# Altium PCB STM32_Pi_HAT.PcbDoc
Units mil, origin at the board's own origin, x right, y up, seen from the top; angles counter-clockwise.
Board outline 2559.08 x 1181.01 mil, 2 copper layers (Top Layer, Bottom Layer); 40 components, 33 nets, 242 pads, 339 vias.
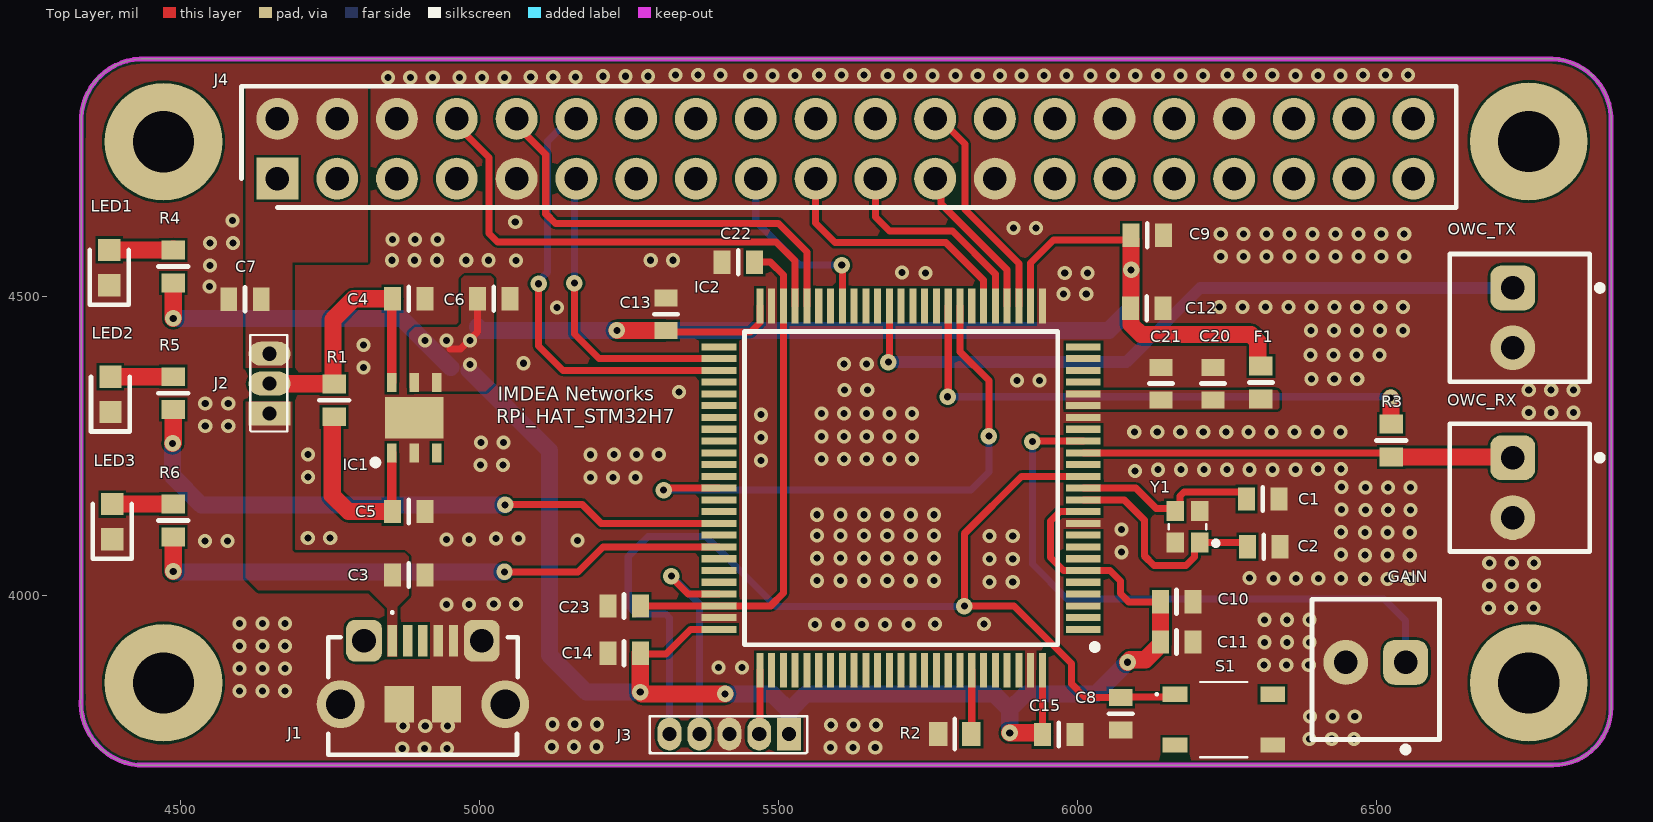
[diagram p0: Top Layer view]
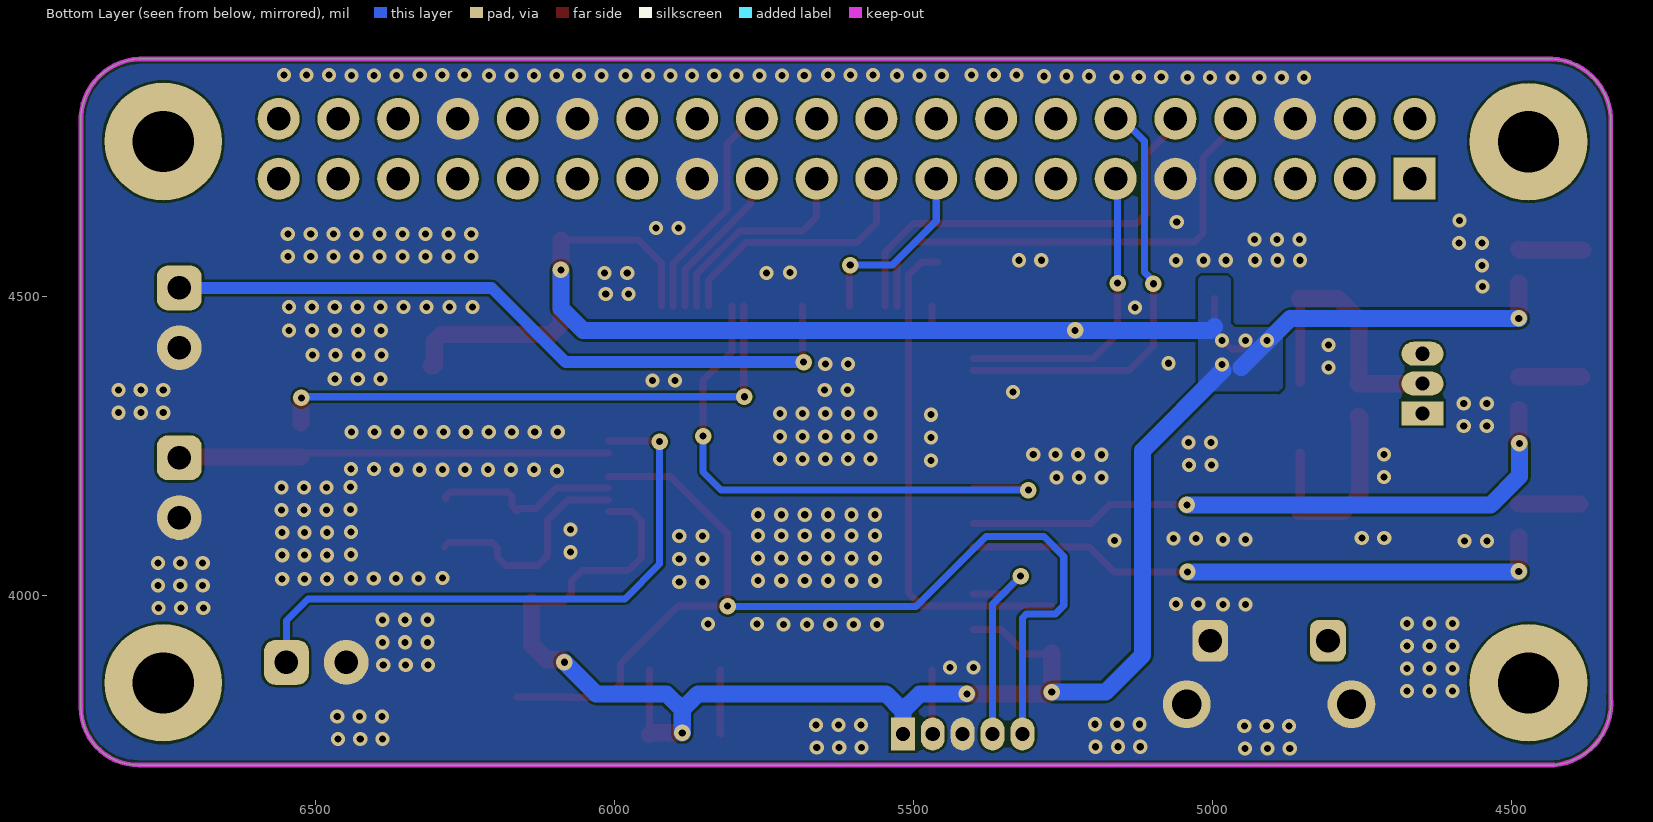
[diagram p1: Bottom Layer view, seen from below]
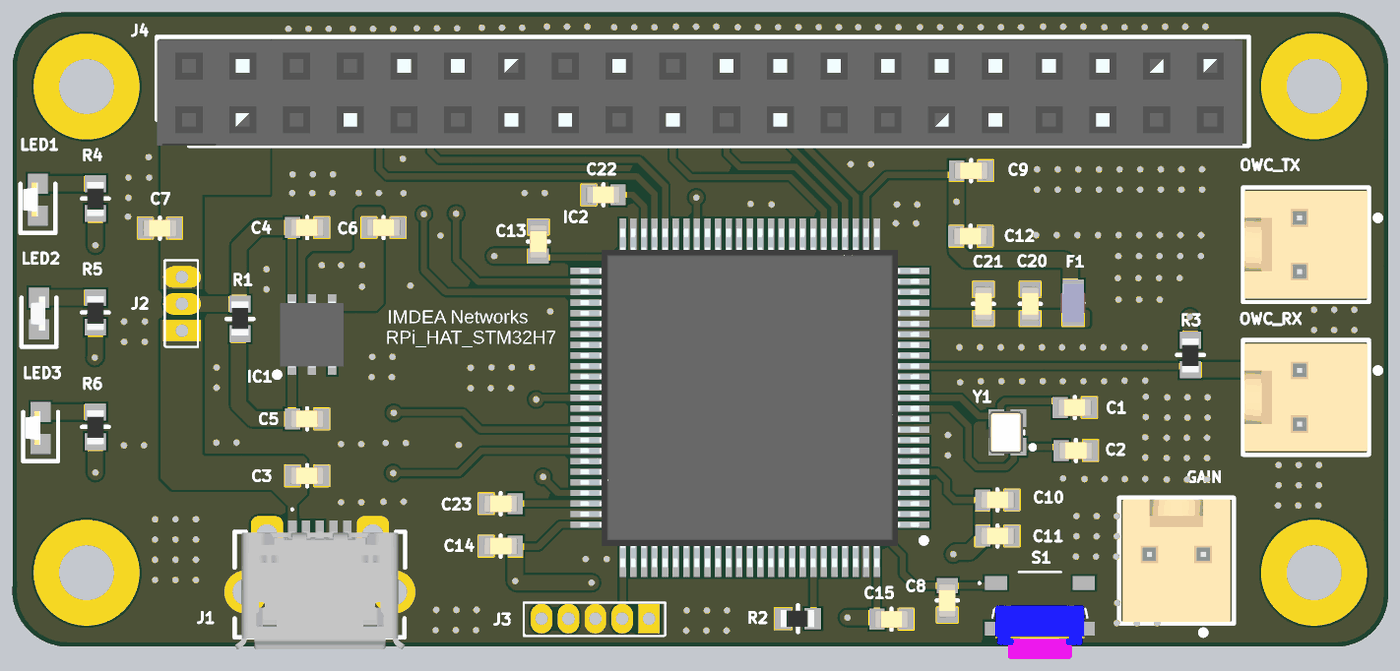
[diagram p2: 3D render of the assembled board from above, using the file's embedded part models]

## Layer stack, top to bottom
Top Solder: solder mask 0.4, Solder Resist, Dk 3.5
Top Layer: signal copper 1.4
Dielectric 1: dielectric 12.6, FR-4, Dk 4.8
Bottom Layer: signal copper 1.4
Bottom Solder: solder mask 0.4, Solder Resist, Dk 3.5

## Board outline
4429,3717 cw(c4438.5,3821.5) 4334,3831 4334,4800 cw(c4437.5,4794.5) 4443,4898 6795,4898 cw(c6790.66,4796) 6892.66,4791.66 6892.66,3812.85 cw(c6796.4,3813.26) 6796,3717

## Design rules (kind name [scope] priority, off if disabled: settings)
BoardOutlineClearance [All] p1: gap=7.87 ignorepadtopadclearanceinfootprint=FALSE
Clearance [All] p1: gap=3.94 ignorepadtopadclearanceinfootprint=FALSE
HoleSize [All] p1: absolutevalues=TRUE maxlimit=118.11 minlimit=1 maxpercent=80.000 minpercent=20.000
MinimumSolderMaskSliver [All] p1: minsoldermaskwidth=7.09
PolygonConnect [All] p1: connectstyle=Direct reliefconductorwidth=10 reliefentries=4 polygonreliefangle="90 Angle" airgapwidth=10
RoutingVias [All] p1: holewidth=28 width=50 viastyle="Through Hole" minholewidth=28 minwidth=50 maxholewidth=28 maxwidth=50
SilkToSolderMaskClearance [IsPad] p1: minsilkscreentomaskgap=3.94 clearancetoexposedcopper=TRUE
SolderMaskExpansion [All] p1: expansion=0 istentingtop=FALSE
SupplyNets "Schematic Supply Nets_4" [InNet('GND')] p1: voltage=0.000
SupplyNets "Schematic Supply Nets_9" [InNet('VUSB')] p2: voltage=0.000
SupplyNets "Schematic Supply Nets_8" [InNet('VCC_IN')] p3: voltage=0.000
SupplyNets "Schematic Supply Nets_7" [InNet('5V_RPi')] p4: voltage=0.000
SupplyNets "Schematic Supply Nets_3" [InNet('VDDA')] p5: voltage=0.000
SupplyNets "Schematic Supply Nets_2" [InNet('VDD_MCU')] p6: voltage=0.000
SupplyNets "Schematic Supply Nets_1" [InNet('VCAP')] p7: voltage=0.000
Width [All] p1: maxlimit=393.7 minlimit=10 preferedwidth=10
27 further rules are at their usual default settings.

## Components (designator, comment, footprint, x,y, rotation, side; value= is the part's Value field where it differs from the comment)
C1 "8pF" CAP0603_ 6310,4162 r0 top
C2 "8pF" CAP0603_ 6312,4082 r0 top
C3 "10uF,16V" CAP0603_ 4881.89,4035 r0 top
C4 "10uF,16V" CAP0603_ 4881.89,4497 r0 top
C5 "100nF,50v" CAP0603_ 4881.89,4141 r0 top
C6 "10uF,16V" CAP0603_ 5024,4497 r0 top
C7 "10uF,16V" CAP0603_ 4608,4496 r180 top
C8 "100nF,50v" CAP0603_ 6072.67,3803 r270 top
C9 "4.7uF,16V" CAP0603_ 6117,4603 r0 top
C10 "100nF,50v" CAP0603_ 6166,3990 r0 top
C11 "100nF,50v" CAP0603_ 6166,3923 r0 top
C12 "100nF,50v" CAP0603_ 6116,4481 r0 top
C13 "100nF,50v" CAP0603_ 5312,4471 r90 top
C14 "100nF,50v" CAP0603_ 5242,3904 r180 top
C15 "100nF,50v" CAP0603_ 5969,3768 r0 top
C20 "10uF,16V" CAP0603_ 6227,4355.03 r90 top
C21 "100nF,50v" CAP0603_ 6140,4355.03 r90 top
C22 "2.2uF,10V" CAP0603_ 5433,4558 r180 top
C23 "2.2uF,10V" CAP0603_ 5242,3983 r180 top
F1 "10" IND0603_ 6307,4357 r270 top
GAIN "61900211121" 61900211121 6499,3877 r0 top
IC1 "ST1L05CPU33R" SON95P300X300X100-7N-D 4891,4297.94 r90 top
IC2 "STM32H723VET6" QFP50P1600X1600X160-100N 5705.35,4180.22 r180 top
J1 "10118194-0001LF" 101181940001LF 4905.57,3832.48 r0 top
J2 "CONN_H3_1.27MM" CONN_H3_1.27MM 4645.06,4300.28 r90 top
J3 "CONN_H5_1.27MM" CONN_H5_1.27MM 5522.72,3765.06 r180 top
J4 "1992" RHDR40W64P254_2X20_5130X500X1375P 4662.17,4697.8 r0 top
LED1 "150060SS75000" LEDC1608X80N 4381,4549 r90 top
LED2 "150060GS75000" LEDC1608X70N 4383,4337 r90 top
LED3 "150060BS75000" LEDC1608X80N 4386,4124 r90 top
OWC_RX "61900211121" 61900211121 6740,4181 r90 top
OWC_TX "61900211121" 61900211121 6740,4465 r90 top
R1 "10K,0603" RES0603_ 4757,4327 r270 top
R2 "10K,0603" RES0603_ 5795,3769 r0 top
R3 "JUMPER" RES0603_ 6525,4260 r90 top
R4 "330R" RES0603_ 4488,4551 r90 top
R5 "330R" RES0603_ 4488,4339 r90 top
R6 "330R" RES0603_ 4488,4126 r90 top
S1 "SKRPASE010" SKRPASE010 6245,3793 r0 top
Y1 "NX2016SA-25.000M-STD-CZS-1" NX2016SA32MEXS00ACS06465 6184.33,4115.57 r90 top

## Footprints (in the part's own frame and the unit in brackets; to place one, negate y for a bottom-side part, rotate by r counter-clockwise, add the part's x,y. Pads: shape width x height; smd on the part's side, far side on the other; paste and mask are expansions set on the pad)
61900211121 [mm] "2.54mm Male Locking Header, 2p"
  rrect50% 1.905x1.905 hole 1: 1(1.27,0.3)
  round 1.905 hole 1: 2(-1.27,0.3)
  silkscreen extent -2.71,-3.52 2.71,2.98, body extent -2.54,-2.9 2.54,2.9, height 11.53
101181940001LF [mm]
  rect 0.4x1.35 smd: 1(-1.3,2.35) 2(-0.65,2.35) 3(0,2.35) 4(0.65,2.35) 5(1.3,2.35)
  rrect50% 1.524x1.778 hole 1.01: MH1(-2.5,2.35) MH4(2.5,2.35)
  round 2.032 hole 1.25: MH2(-3.5,-0.35) MH3(3.5,-0.35)
  rect 1.25x1.55 smd: MP1(-1,-0.35) MP2(1,-0.35)
  silkscreen extent -4.03,-2.5 4.03,3.6, body extent -4.02,-3.07 4.03,2.51, height 2.76
CAP0603_ [mm]
  rect 0.72x0.99 smd paste+0 mask+0.051: 1(-0.69,0) 2(0.69,0)
  silkscreen extent 0,-0.5 0,0.5, body extent -0.8,-0.41 0.8,0.41, height 0.57
CONN_H3_1.27MM [mm]
  rect 1.016x1.778 hole 0.6: 1(0.12,-0.1)
  oval 1.016x1.778 hole 0.6: 2(1.39,-0.1) 3(2.66,-0.1)
  silkscreen extent -0.64,-0.86 3.46,0.71
CONN_H5_1.27MM [mm]
  rect 1.016x1.397 hole 0.6: 1(0.12,-0.1)
  oval 1.016x1.397 hole 0.6: 2(1.39,-0.1) 3(2.66,-0.1) 4(3.93,-0.1) 5(5.2,-0.1)
  silkscreen extent -0.64,-0.86 6.04,0.71
IND0603_ [mm]
  rect 0.8x1 smd mask+0.051: 1(-0.7,0) 2(0.7,0)
  silkscreen extent 0,-0.5 0,0.5, body extent -0.9,-0.6 0.9,0.58, height 0.83
LEDC1608X70N [mm]
  rect 0.95x0.95 smd: 1(-0.75,0) 2(0.75,0)
  silkscreen extent -1.58,-0.82 0.75,0.82, body extent -0.8,-0.3 0.8,0.4, height 0.4
LEDC1608X80N [mm]
  rect 0.95x0.95 smd: 1(-0.75,0) 2(0.75,0)
  silkscreen extent -1.58,-0.82 0.75,0.82, body extent -0.8,0 0.8,0.7, height 0.4
NX2016SA32MEXS00ACS06465 [mm]
  rect 0.85x0.75 smd: 1(-0.675,-0.525) 2(0.675,-0.525) 3(0.675,0.525) 4(-0.675,0.525)
  silkscreen extent -0.8,-1.3 0.1,0.8, body extent -1,-0.73 1,0.87, height 0.46
QFP50P1600X1600X160-100N [mm]
  rect 1.475x0.3 smd: 1(-7.738,6) 2(-7.738,5.5) 3(-7.738,5) 4(-7.738,4.5) 5(-7.738,4) 6(-7.738,3.5) 7(-7.738,3) 8(-7.738,2.5) 9(-7.738,2) 10(-7.738,1.5) 11(-7.738,1) 12(-7.738,0.5) 13(-7.738,0) 14(-7.738,-0.5) 15(-7.738,-1) 16(-7.738,-1.5) 17(-7.738,-2) 18(-7.738,-2.5) 19(-7.738,-3) 20(-7.738,-3.5) 21(-7.738,-4) 22(-7.738,-4.5) 23(-7.738,-5) 24(-7.738,-5.5) 25(-7.738,-6) 51(7.738,-6) 52(7.738,-5.5) 53(7.738,-5) 54(7.738,-4.5) 55(7.738,-4) 56(7.738,-3.5) 57(7.738,-3) 58(7.738,-2.5) 59(7.738,-2) 60(7.738,-1.5) 61(7.738,-1) 62(7.738,-0.5) 63(7.738,0) 64(7.738,0.5) 65(7.738,1) 66(7.738,1.5) 67(7.738,2) 68(7.738,2.5) 69(7.738,3) 70(7.738,3.5) 71(7.738,4) 72(7.738,4.5) 73(7.738,5) 74(7.738,5.5) 75(7.738,6)
  rect 0.3x1.475 smd: 26(-6,-7.738) 27(-5.5,-7.738) 28(-5,-7.738) 29(-4.5,-7.738) 30(-4,-7.738) 31(-3.5,-7.738) 32(-3,-7.738) 33(-2.5,-7.738) 34(-2,-7.738) 35(-1.5,-7.738) 36(-1,-7.738) 37(-0.5,-7.738) 38(0,-7.738) 39(0.5,-7.738) 40(1,-7.738) 41(1.5,-7.738) 42(2,-7.738) 43(2.5,-7.738) 44(3,-7.738) 45(3.5,-7.738) 46(4,-7.738) 47(4.5,-7.738) 48(5,-7.738) 49(5.5,-7.738) 50(6,-7.738) 76(6,7.738) 77(5.5,7.738) 78(5,7.738) 79(4.5,7.738) 80(4,7.738) 81(3.5,7.738) 82(3,7.738) 83(2.5,7.738) 84(2,7.738) 85(1.5,7.738) 86(1,7.738) 87(0.5,7.738) 88(0,7.738) 89(-0.5,7.738) 90(-1,7.738) 91(-1.5,7.738) 92(-2,7.738) 93(-2.5,7.738) 94(-3,7.738) 95(-3.5,7.738) 96(-4,7.738) 97(-4.5,7.738) 98(-5,7.738) 99(-5.5,7.738) 100(-6,7.738)
  silkscreen extent -8.35,-6.65 6.65,6.87, body extent -8,-8 8,8, height 1.6
RES0603_ [mm]
  rect 0.8x1 smd paste+0 mask+0.051: 1(-0.7,0) 2(0.7,0)
  silkscreen extent 0,-0.64 0,0.64, body extent -0.82,-0.4 0.78,0.4, height 0.4
RHDR40W64P254_2X20_5130X500X1375P [mil]
  rect 70x70 hole 39.37: 1(0,0)
  round 70 hole 39.37: 2(0,100) 3(100,0) 4(100,100) 5(200,0) 6(200,100) 7(300,0) 8(300,100) 9(400,0) 10(400,100) 11(500,0) 12(500,100) 13(600,0) 14(600,100) 15(700,0) 16(700,100) 17(800,0) 18(800,100) 19(900,0) 20(900,100) 21(1000,0) 22(1000,100) 23(1100,0) 24(1100,100) 25(1200,0) 26(1200,100) 27(1300,0) 28(1300,100) 29(1400,0) 30(1400,100) 31(1500,0) 32(1500,100) 33(1600,0) 34(1600,100) 35(1700,0) 36(1700,100) 37(1800,0) 38(1800,100) 39(1900,0) 40(1900,100)
  silkscreen extent -60,-48 1972,154, body extent -60,-48 1960,148, height 541
SKRPASE010 [mm]
  rect 1.05x0.65 smd: 1(-2.075,1.075) 2(2.075,1.075) 3(-2.075,-1.075) 4(2.075,-1.075)
  silkscreen extent -2.9,-1.6 1,1.6, body extent -2.3,-1.6 2.3,1.6, height 2.41
SON95P300X300X100-7N-D [mm]
  rect 0.8x0.4 smd: 1(-1.5,0.95) 2(-1.5,0) 3(-1.5,-0.95) 4(1.5,-0.95) 5(1.5,0) 6(1.5,0.95)
  rect 1.75x2.5 smd: 7(0,0)
  silkscreen extent -2.02,1.52 -1.78,1.77, body extent -1.55,-1.5 1.55,1.5, height 1

## Part data
C1 C2: library part C0603-4.7pF-100v, "Multilayer Ceramic Capacitors MLCC - SMD/SMT WCAP-CSGP 100V 4.7pF 0603 .25pFTol", Fabricant=WURTH, Fournisseur=Mouser, Ref Fabricant=885012006091, Ref Fournisseur=710-885012006091, Unit Price=0.13, Unit Price(100)=0.053
C3 C4 C6 C7 C20: library part C0603-10uF-16v, "SMD/SMT 10uF 0603 10% 16V MLCC", Fabricant="Murata Electronics", Fournisseur=Mouser, Help URL=https://www.mouser.mx/datasheet/2/281/murata_03052018_GRM_Series_1-1310166.pdf, Ref Fabricant=GRM188R61C106KALJ, Ref Fournisseur=81-GRM188R61C106KALJ, Unit Price=0.559, Unit Price(100)=0.233
C5 C8 C10 C11 C12 C13 C14 C15 C21: library part C0603-100nF-50V-X7R, "Capacitor, Ceramic, 10nF, 50V, 20%, X7R, 0603", Fabricant=YAGEO, Fournisseur=Mouser, Ref Fabricant=C0603MRY5V9BB104, Ref Fournisseur=603-C0603MRY5V9BB104, Unit Price=0.13, Unit Price(100)=0.03
C9: library part C0603-4.7uF-16V-X5R, "Multilayer Ceramic Capacitors MLCC - SMD/SMT 0603 16VDC 4.7uF 20% X5R", Fabricant="Taiyo Yuden", Fournisseur=Mouser, Ref Fabricant=EMK107ABJ475MA-T, Ref Fournisseur=963-EMK107ABJ475MA-T, Unit Price=0.364, Unit Price(100)=0.109
C22 C23: library part C0603-2.2uF-10V-X5R, "Multilayer Ceramic Capacitors MLCC - SMD/SMT WCAP-CSGP 2.2uF 0603 20% 10V MLCC", Fabricant="Wurth Electronics", Fournisseur=Mouser, Ref Fabricant=885012106011, Ref Fournisseur=710-885012106011, Unit Price=0.208, Unit Price(100)=0.182
F1: library part MH1608-100Y, "Ferrite Beads 10 ohms 25% HIGH CURRENT 6A", Fabricant=Bourns, Fournisseur=MOUSER, Help URL=https://www.mouser.mx/datasheet/2/54/mh-777565.pdf, Ref Fabricant=MH1608-100Y, Ref Fournisseur=652-MH1608-100Y, Unit Price=0.13, Unit Price(100)=0.027
GAIN OWC_RX OWC_TX: library part CMP-1502-00584-3, Color=Beige, Contact Resistance=20mΩ, Current Rating=3A, Flammability Rating="UL94 V-0", Insulation Resistance=1GΩ, Max Operating Temperature=105°C, Min Operating Temperature=-40°C, Operating Supply Voltage=250V, Connector Type="Male Pin", Contact Gender=Male, Contact Material=Copper, Contact Mating Length=7.493mm, Contact Plating=Tin, Fastening Type=Friction, Gender=Male, Height=11.75mm, Housing Material=Nylon, Lead Pitch=2.54mm, Length=5.08mm, Mount="Through Hole", NexarPartId=18818218, Number of Contacts=2, Number of Pins=2, Number of Positions=2, Number of Rows=1, Orientation=Vertical, Packaging=Bulk, Pitch=2.54mm, REACH SVHC=Unknown, RoHS=Compliant, Termination="Through Hole", Voltage Rating=250V, Width=5.12mm
IC1: "Integrated Circuit", Manufacturer_Name=STMicroelectronics, Mouser Part Number=511-ST1L05CPU33R, Arrow Part Number=ST1L05CPU33R, Arrow Price/Stock=https://www.arrow.com/en/products/st1l05cpu33r/stmicroelectronics?utm_currency=USD&region=nac, Datasheet Link=https://www.st.com/resource/en/datasheet/st1l05.pdf, Height=1mm, Manufacturer_Part_Number=ST1L05CPU33R, Mouser Price/Stock=https://www.mouser.co.uk/ProductDetail/STMicroelectronics/ST1L05CPU33R?qs=J6yVZnuyYCM7Ijtp87hQ4A%3D%3D
IC2: library part CMP-005-000001-1, "Integrated Circuit", Manufacturer_Name=STMicroelectronics, Mouser Part Number=511-STM32H723VET6, Arrow Part Number=STM32H723VET6, Arrow Price/Stock=https://www.arrow.com/en/products/stm32h723vet6/stmicroelectronics?utm_currency=USD&region=nac, Datasheet Link=https://www.st.com/resource/en/datasheet/stm32h723zg.pdf, Design Item ID=STM32H723VET6, Height=1.6mm, Manufacturer_Part_Number=STM32H723VET6, Mouser Price/Stock=https://www.mouser.co.uk/ProductDetail/STMicroelectronics/STM32H723VET6?qs=sPbYRqrBIVnD9Udgf5csJA%3D%3D, Source=SamacSys.SchLib
J1: "Connector", Manufacturer_Name="Amphenol Communications Solutions", Arrow Part Number=10118194-0001LF, Arrow Price/Stock=https://www.arrow.com/en/products/10118194-0001lf/amphenol-fci?utm_currency=USD&region=nac, Datasheet Link=https://www.amphenol-cs.com/micro-usb-101181940001lf.html, Height=3.25mm, Manufacturer_Part_Number=10118194-0001LF
J4: "Connector", Manufacturer_Name=Adafruit, Mouser Part Number=485-1992, Arrow Part Number=1992, Arrow Price/Stock=https://www.arrow.com/en/products/1992/adafruit-industries?utm_currency=USD&region=nac, Datasheet Link=https://cdn-shop.adafruit.com/datasheets/1992_datasheet2.pdf, Height=13.75mm, Manufacturer_Part_Number=1992, Mouser Price/Stock=https://www.mouser.co.uk/ProductDetail/Adafruit/1992?qs=GURawfaeGuBPldm8Estq5w%3D%3D
LED1: "LED", Manufacturer_Name="Wurth Elektronik", Mouser Part Number=710-150060SS75000, Datasheet Link=https://www.we-online.com/catalog/datasheet/150060SS75000.pdf, Height=0.8mm, Manufacturer_Part_Number=150060SS75000, Mouser Price/Stock=https://www.mouser.co.uk/ProductDetail/Wurth-Elektronik/150060SS75000?qs=LlUlMxKIyB0oQaxwspeTEA%3D%3D
LED2: "LED", Manufacturer_Name="Wurth Elektronik", Mouser Part Number=710-150060GS75000, Datasheet Link=https://www.we-online.com/catalog/datasheet/150060GS75000.pdf, Height=0.7mm, Manufacturer_Part_Number=150060GS75000, Mouser Price/Stock=https://www.mouser.co.uk/ProductDetail/Wurth-Elektronik/150060GS75000?qs=LlUlMxKIyB0UYkq5lDO8nA%3D%3D
LED3: "LED", Manufacturer_Name="Wurth Elektronik", Mouser Part Number=710-150060BS75000, Datasheet Link=https://www.we-online.com/catalog/datasheet/150060BS75000.pdf, Height=0.8mm, Manufacturer_Part_Number=150060BS75000, Mouser Price/Stock=https://www.mouser.co.uk/ProductDetail/Wurth-Elektronik/150060BS75000?qs=LlUlMxKIyB2DLLpXQThavA%3D%3D
R1 R2: library part R0603-10K-1/10W-1%, "Thick Film Resistors - SMD 10K OHM 1% 0603", Fabricant=Yageo, Fournisseur=Mouser, Ref Fabricant=RC0603FR-0710KL, Ref Fournisseur=603-RC0603FR-0710KL, Unit Price=0.13, Unit Price(100)=0.008
R3: library part R0603-0R-1/10W-5%, "Resistor, ThinFilm, 0R, 5%, 1/8W, 0603", Fabricant=Yageo, Fournisseur=Mouser, Ref Fabricant=SFR03EZPJ000, Ref Fournisseur=755-SFR03EZPJ000, Unit Price=0.13, Unit Price(100)=0.03
R4 R5 R6: library part R0603-330R-1/10W-1%_1, "Thick Film Resistors - SMD 330Ohmns 1/10W 0603 5%", Fabricant=YAGEO, Fournisseur=Mouser, Help URL=https://www.mouser.mx/ProductDetail/YAGEO/AR0603JR-07330RL?qs=tggtontpCXOcsXkekzf4sA%3D%3D, Ref Fabricant=AR0603JR-07330RL, Ref Fournisseur=603-AR0603JR-07330RL, Unit Price=0.403, Unit Price(100)=0.137
S1: "Switch", Manufacturer_Name="ALPS Electric", Mouser Part Number=688-SKRPASE010, Datasheet Link=https://www.mouser.ca/ProductDetail/ALPS/SKRPASE010?qs=byeeYqUIh0NdKk8WD590Nw%3D%3D, Height=2.5mm, Manufacturer_Part_Number=SKRPASE010, Mouser Price/Stock=https://www.mouser.co.uk/ProductDetail/Alps-Alpine/SKRPASE010?qs=byeeYqUIh0NdKk8WD590Nw%3D%3D
Y1: "Crystal or Oscillator", Manufacturer_Name=NDK, Mouser Part Number=344-NX2016SA25MSTZS1, Datasheet Link=https://datasheet.datasheetarchive.com/originals/distributors/DKDS-17/332064.pdf, Manufacturer_Part_Number=NX2016SA-25.000M-STD-CZS-1, Mouser Price/Stock=https://www.mouser.co.uk/ProductDetail/NDK/NX2016SA-25.000M-STD-CZS-1?qs=w%2Fv1CP2dgqozB742%252BoULZA%3D%3D
J2: Fabricant=Harwin, Fournisseur=Mouser, Help URL=https://www.mouser.mx/datasheet/2/181/M50-353-1100851.pdf, Ref Fabricant=M50-3530342, Ref Fournisseur=855-M50-3530342, Unit Price=0.182, Unit Price(100)=0.088
J3: Fabricant=Samtec, Fournisseur=Mouser, Help URL=https://www.mouser.mx/datasheet/2/527/tms_th-1370533.pdf, Ref Fabricant=TMS10560GS, Ref Fournisseur=200-TMS10560GS, Unit Price(=1.78, Unit Price(100)=1.09

## Free pads (board coordinates)
  round 196.85 hole 102.36: 2(4471.54,3854.49) 2(4471.54,4759.49) 2(6755,3854.49) 2(6755,4760)

## Via types
v1: diameter 23.62, hole 11.81, Top Layer to Bottom Layer, tented both sides, 317 vias
v2: diameter 27.56, hole 11.81, Top Layer to Bottom Layer, tented both sides, 22 vias

## Nets (pads, with @x,y where several pads share a name; then routed paths per layer and width w, separated by ;. In a path a pad name is that pad's centre, name@x,y a point inside that pad or via, vN(x,y) a via of type N, cw(c..) or ccw(c..) an arc to the next point about the centre after c; other vN are vias at no path point)
5V_RPi: C7.1 J2.3 J4.2 J4.4
ADC_IN: IC2.16 OWC_RX.1 R3.1 | length 719.6
  Top Layer w11.81: IC2.16 6518.17,4239.28 R3.1
  Top Layer w28.74: R3.1 OWC_RX.1@6726.75,4232.44
COMP1_IN: IC2.34 R3.2 | length 936
  Top Layer w11.81: v2(5783,4333) 5784.09,4334.09 IC2.34
  Top Layer w28.74: v2(6524,4331) 6524.5,4330.5 6524.5,4290.06 R3.2@6525,4289.56
  Bottom Layer w11.81: v2(5783,4333) 6522,4333 v2(6524,4331)
COMP1_OUT: IC2.33 IC2.63 | length 948.3
  Top Layer w11.81: v2(5308,4177) 5311.22,4180.22 IC2.63 ; IC2.33 5803.78,4408.22 5852,4360 v2(5852,4267)
  Bottom Layer w11.81: v2(5308,4177) 5822,4177 5852,4207 v2(5852,4267)
FLAG_1: IC2.66 R5.1 | length 1059.1
  Top Layer w11.81: v2(5043,4152) 5044,4153 5172,4153 5203.83,4121.17 IC2.66
  Top Layer w28.74: v2(4486.93,4254.93) 4488,4256 R5.1
  Bottom Layer w28.74: v2(4486.93,4254.93) 4486.93,4200.07 4535,4152 v2(5043,4152)
FLAG_2: IC2.68 R6.1 | length 987.9
  Top Layer w11.81: v2(5042,4040) 5165,4040 5206.8,4081.8 IC2.68
  Top Layer w28.74: v2(4488,4041) R6.1
  Bottom Layer w28.74: v2(4488,4041) 4489,4040 v2(5042,4040)
GAIN: GAIN.1 IC2.17 | length 1023.5
  Top Layer w11.81: v2(5925,4258) 5925.96,4258.96 IC2.17
  Bottom Layer w11.81: v2(5925,4258) 5925,4053 5983,3995 6513,3995 6549,3959 GAIN.1
GND: C1.2 C2.2 C3.2 C4.2 C5.2 C6.2 C7.2 C8.2 C9.2 C10.2 C11.2 C12.2 C13.2 C14.2 C15.2 C20.2 C21.2 C22.2 C23.2 GAIN.2 IC1.2 IC1.7 IC2.10 IC2.19 IC2.26 IC2.49 IC2.74 IC2.99 J1.4 J1.5 J1.MH2 J1.MH3 J1.MH4 J1.MP1 J1.MP2 J3.3 J4.6 J4.9 J4.25 J4.30 J4.34 LED1.1 LED2.1 LED3.1 OWC_RX.2 OWC_TX.2 R2.1 S1.4 Y1.2 Y1.4
  other v1: 4871,3744.67 4908.5,3744.67 4946,3744.67 5587,3746.67 5624.5,3746.67 5662,3746.67 5121,3747.67 5158.5,3747.67 5196,3747.67 6388,3760.67 6425.5,3760.67 6463,3760.67 4872,3782.33 4909.5,3782.33 4947,3782.33 5588,3784.33 5625.5,3784.33 5663,3784.33 5122,3785.33 5159.5,3785.33 5197,3785.33 6389,3798.33 6426.5,3798.33 6464,3798.33 4599,3841 4637,3841 4675,3841 4599,3878.67 4637,3878.67 4675,3878.67 5400,3880 5439.21,3880 6312,3884.67 6349.5,3884.67 6387,3884.67 4599,3916.33 4637,3916.33 4675,3916.33 6313,3922.33 6350.5,3922.33 6388,3922.33 5561,3952 5600.21,3952 5639.43,3952 5678.64,3952 5717.86,3952 5762,3953 5843.86,3953 4599,3954 4637,3954 4675,3954 6313,3960 6350.5,3960 6388,3960 6688,3979.67 6725.5,3979.67 6763,3979.67 4945,3985.67 4982.5,3985.67 5024,3986.67 5061.5,3986.67 6689,4017.33 6726.5,4017.33 6764,4017.33 5853,4023 5892,4023 5564.5,4025.33 5603.71,4025.33 5642.93,4025.33 5682.14,4025.33 5721.36,4025.33 5760.57,4025.33 6481,4028 6518.5,4028 6556,4028 6328,4029 6365.5,4029 6403,4029 6441,4029 6288,4030 6689,4055 6726.5,4055 6764,4055 5853,4061.5 5892,4061.5 5564.5,4063 5603.71,4063 5642.93,4063 5682.14,4063 5721.36,4063 5760.57,4063 6481,4068 6518.5,4068 6556,4068 6441,4069 6074,4073 4541,4091.67 4578.5,4091.67 5164,4092.33 4945,4094 4982.5,4094 5028,4096 5065.5,4096 4713,4096.67 4750.5,4096.67 5853,4100 5892,4100 5564.5,4100.67 5603.71,4100.67 5642.93,4100.67 5682.14,4100.67 5721.36,4100.67 5760.57,4100.67 6481,4105.67 6518.5,4105.67 6556,4105.67 6441,4106.67 6074,4110.88 5564.5,4135.67 5603.71,4135.67 5642.93,4135.67 5682.14,4135.67 5721.36,4135.67 5760.57,4135.67 6482,4143.33 6519.5,4143.33 6557,4143.33 6442,4144.33 6482,4181 6519.5,4181 6557,4181 6442,4182 5186,4198 5223.5,4198 5261,4198 4713.33,4199 6096.69,4209 6135.12,4211 6173.56,4211 6212,4211 6250.44,4211 6287.69,4211 6326.12,4211 6364.56,4211 6402.56,4212 6441,4212 5002,4218.67 5039.5,4218.67 5471,4226.67 5572,4228.67 5609.88,4228.67 5647.75,4228.67 5685.62,4228.67 5723.5,4228.67 4713.33,4236.5 5186,4236 5225,4236.67 5262.5,4236.67 5300,4236.67 5003,4256.33 5040.5,4256.33 5471,4264.83 5572,4266.83 5609.88,4266.83 5647.75,4266.83 5685.62,4266.83 5723.5,4266.83 6095.25,4274 6133.69,4274 6172.12,4274 6210.56,4274 6249,4274 6286.25,4274 6324.69,4274 6363.12,4274 6401.56,4274 6440,4274 4541.5,4284.33 4580,4284.33 5471,4303 5572,4305 5609.88,4305 5647.75,4305 5685.62,4305 5723.5,4305 6755,4306.33 6792.5,4306.33 6830,4306.33 4541.5,4322 4580,4322 5334,4341 5610.88,4344 5648.75,4344 6755,4344 6792.5,4344 6830,4344 5898.88,4360 5936.75,4360 6391.36,4363 6429.72,4363 6468.08,4363 4806.33,4382 5609.88,4388 5647.75,4388 5074,4389 6390,4403 6428.36,4403 6466.72,4403 6505.08,4403 4806.33,4419.5 6391,4444 6429.36,4444 6467.72,4444 6506.08,4444 6544.44,4444 5130,4482 6238,4483 6276.36,4483 6314.72,4483 6353.08,4483 6391.44,4483 6429.8,4483 6468.16,4483 6506.52,4483 6544.88,4483 5977,4505 6014.88,4505 4548.5,4517.33 5745.88,4540 5979,4540 6016.88,4540 5707,4541 4549.5,4552.33 4853.94,4561.33 4891.44,4561.33 4928.94,4561.33 4977.94,4561.33 5015.44,4561.33 5061,4561 5286.5,4561.33 5324,4561.33 6239.81,4567.67 6278.17,4567.67 6316.53,4567.67 6354.89,4567.67 6393.25,4567.67 6431.61,4567.67 6469.97,4567.67 6508.33,4567.67 6546.69,4567.67 4549.5,4590 4588,4590 4854.94,4596 4892.44,4596 4929.94,4596 6239.81,4605.33 6278.17,4605.33 6316.53,4605.33 6354.89,4605.33 6393.25,4605.33 6431.61,4605.33 6469.97,4605.33 6508.33,4605.33 6546.69,4605.33 5893,4615 5930.88,4615 5060,4625 4587,4628 4846.94,4867 4884.44,4867 4921.94,4867 4966.94,4867 5004.44,4867 5041.94,4867 5085.94,4868 5123.44,4868 5160.94,4868 5206.94,4869 5244.44,4869 5281.94,4869 5452.94,4870 5490.44,4870 5527.94,4870 5682.94,4870 5720.44,4870 5757.94,4870 5795.94,4870 5833.44,4870 5870.94,4870 5906.94,4870 5944.44,4870 5981.94,4870 6021.94,4870 6059.44,4870 6096.94,4870 6134.94,4870 6172.44,4870 6209.94,4870 6364.94,4870 6402.44,4870 6439.94,4870 5327.94,4871 5365.44,4871 5402.94,4871 5567.94,4871 5605.44,4871 5642.94,4871 6250.94,4871 6288.44,4871 6325.94,4871 6477.94,4871 6515.44,4871 6552.94,4871
NetC5_1: C5.1 IC1.1 R1.2 | length 343.9
  Top Layer w15.75: IC1.1 4853.6,4142.13 C5.1
  Top Layer w28.74: R1.2 4755.38,4299.44 4754,4298.06 4754,4168 4781,4141 C5.1
NetIC2_94: IC2.94 R2.2 | length 106.9
  Top Layer w11.81: R2.2 5823.46,3769.91 IC2.94
NetLED1_2: LED1.2 R4.2 | length 108
  Top Layer w28.74: LED1.2 4485.47,4578.53 4486,4578 R4.2@4488,4580
NetLED2_2: LED2.2 R5.2 | length 105
  Top Layer w28.74: LED2.2 R5.2@4487.98,4366.54
NetLED3_2: LED3.2 R6.2 | length 102
  Top Layer w28.74: LED3.2 R6.2@4487.98,4153.54
NRST: C8.1 IC2.14 J3.5 S1.1 | length 1774.2
  Top Layer w11.81: IC2.14 5906.91,4199.91 5810.95,4103.95 v2(5811,3983) v2(5811,3983) 5894,3983 5990,3887 5990,3853 6013,3830 6013.08,3830.08 6072.58,3830.08 C8.1 6073.25,3830.74 6162.73,3830.74 S1.1@6163.31,3831.32
  Bottom Layer w11.81: J3.5 5318,3963 5311,3970 5263,3970 5249,3984 5249,4066 5282,4099 5379,4099 5496,3982 5810,3982 v2(5811,3983)
OSC_IN: C2.1 IC2.12 Y1.1 | length 382.8
  Top Layer w11.81: IC2.12 6078.46,4160.54 6112,4127 6112,4067 6128,4051 6182,4051 6196.14,4065.14 6196.14,4080.14 Y1.1 6277.83,4089 C2.1
OSC_OUT: C1.1 IC2.13 Y1.3 | length 318.9
  Top Layer w11.81: IC2.13 6097.78,4180.22 6132,4146 6159.81,4146 Y1.3 6171.66,4150.15 6171.66,4167.08 6178.58,4174 6274.57,4174 6282.83,4165.73 C1.1
OWC_TX: IC2.39 OWC_TX.1 | length 1190.1
  Top Layer w11.81: v2(5684,4391) 5685.67,4392.67 IC2.39
  Bottom Layer w19.68: v2(5684,4391) 6082,4391 6206,4515 OWC_TX.1
PB13: IC2.52 J4.11 | length 519.9
  Top Layer w11.81: v2(5159,4523) 5159,4438 5200.24,4396.76 IC2.52
  Bottom Layer w11.81: v2(5159,4523) 5159,4694.63 J4.11
PE13: IC2.43 J4.17 | length 313.9
  Top Layer w11.81: v2(5606,4553) 5606.93,4552.07 IC2.43
  Bottom Layer w11.81: J4.17 5462.17,4626.83 5536,4553 v2(5606,4553)
STM_SPI1_MISO: IC2.30 J4.21 | length 357.6
  Top Layer w11.81: J4.21 5662.17,4633.83 5686,4610 5791,4610 5862.83,4538.17 IC2.30
STM_SPI1_MOSI: IC2.31 J4.19 | length 437.7
  Top Layer w11.81: J4.19 5562.17,4623.83 5595,4591 5780,4591 5843.15,4527.85 IC2.31
STM_SPI1_NSS: IC2.28 J4.24 | length 386.4
  Top Layer w11.81: J4.24@5751.46,4797.8 5767.2,4797.8 5783.29,4781.7 5786.3,4781.7 5812,4756 5812,4646 5902.2,4555.8 IC2.28
STM_SPI1_SCK: IC2.29 J4.23 | length 262.8
  Top Layer w11.81: J4.23 5771.65,4688.31 5771.65,4656.35 5882.52,4545.48 IC2.29
SWCLK: IC2.76 J3.2 | length 107
  Top Layer w11.81: J3.2 5469.13,3770.13 IC2.76
SWDIO: IC2.72 J3.4 | length 376.8
  Top Layer w11.81: v2(5321,4033) 5324,4030 5324,4028 5348.94,4003.06 IC2.72
  Bottom Layer w11.81: v2(5321,4033) 5368,3986 J3.4
USART3_FLW: IC2.53 J4.12 | length 720.2
  Top Layer w11.81: v2(5099,4522) 5099,4418 5139.93,4377.07 IC2.53
  Bottom Layer w11.81: v2(5099,4522) 5099,4526.26 5114,4541.26 5114,4760.34 J4.12@5151.46,4797.8
USART3_RX: IC2.47 J4.8 | length 824.8
  Top Layer w11.81: J4.8@4951.46,4797.8 5016,4733.25 5016,4606 5030,4592 5496,4592 5528.19,4559.81 IC2.47
USART3_TX: IC2.46 J4.10 | length 737.1
  Top Layer w11.81: J4.10@5051.46,4797.8 5111,4738.25 5111,4639 5127,4623 5500,4623 5547.87,4575.13 IC2.46
VCAP: C22.1 C23.1 IC2.48 IC2.73 | length 837.5
  Top Layer w11.81: C23.1 5269.54,3983.37 IC2.73 5487.37,3983.37 5508.5,4004.5 IC2.48 5508.5,4536.5 5487,4558 C22.1
VCC_IN: C4.1 IC1.6 J2.2 R1.1 | length 471.5
  Top Layer w15.75: IC1.6 4853.6,4495.87 C4.1
  Top Layer w28.74: J2.2 4649.22,4354.78 4756.78,4354.78 R1.1 4756.38,4354.56 4755,4355.94 4755,4462 4790,4497 C4.1
VDD_MCU: C6.1 C9.1 C10.1 C11.1 C12.1 C13.1 C14.1 C15.1 F1.1 IC1.4 IC1.5 IC2.6 IC2.11 IC2.27 IC2.50 IC2.75 IC2.100 J3.1 R4.1 | length 5319.5
  Top Layer w11.81: 4951,4413 4968.67,4413 4996.83,4441.17 C6.1 ; C14.1 5270.17,3903 5312,3903 5353,3944 IC2.75 ; C13.1@5313,4441.17 5453.17,4441.17 5469.13,4457.13 IC2.50 ; IC2.27 5921.89,4556.89 5960,4595 C9.1@6089.83,4595 ; C15.1@5941.57,3768.26 IC2.100 ; IC2.11 5970.85,4140.85 5955,4125 5955,4064 5976.57,4042.43 IC2.6 6054.57,4042.43 6072,4025 6072,4004 6086,3990 C10.1
  Top Layer w28.74: v2(4488,4464) R4.1 ; v2(5230,4444) 5230.08,4443.92 5311.92,4443.92 C13.1 ; C14.1 5269.17,3839.17 v2(5269,3839) 5272,3836 v2(5411,3836) ; v2(5887,3771) 5938.83,3771 C15.1@5941.57,3768.26 ; v2(6084,3889) 6088.07,3893.07 6113.82,3893.07 6138.83,3918.08 C11.1 C10.1 ; C9.1@6089.83,4595 v2(6089.83,4545) 6089.83,4453.84 6106.67,4437 6290.16,4437 6301.69,4425.48 6301.69,4385.94 6303.06,4384.56 F1.1
  Bottom Layer w28.74: v2(4488,4464) 4870,4464 4952,4382 ; v1@4982.81,4377.19 5117,4243 5117,3901 5179,3839 v2(5269,3839) ; 4997,4450 5003,4444 v2(5230,4444) 6053,4444 6089.83,4480.83 v2(6089.83,4545) ; v2(5411,3836) 5490,3836 5518,3808 ; J3.1 5518,3808 ; v2(5887,3771) 5887,3809.84 ; v2(6084,3889) 6031,3836 5913.16,3836 5887,3809.84 ; 5518,3808 5546,3836 5860.84,3836 5887,3809.84
  other v1: 4984,4387 4909,4427 4945,4427 4984,4427
VDDA: C20.1 C21.1 F1.2 IC2.20 IC2.21
VUSB: C3.1 J1.1 J2.1
pads on no net: IC1.3 IC2.1 IC2.2 IC2.3 IC2.4 IC2.5 IC2.7 IC2.8 IC2.9 IC2.15 IC2.18 IC2.22 IC2.23 IC2.24 IC2.25 IC2.32 IC2.35 IC2.36 IC2.37 IC2.38 IC2.40 IC2.41 IC2.42 IC2.44 IC2.45 IC2.51 IC2.54 IC2.55 IC2.56 IC2.57 IC2.58 IC2.59 IC2.60 IC2.61 IC2.62 IC2.64 IC2.65 IC2.67 IC2.69 IC2.70 IC2.71 IC2.77 IC2.78 IC2.79 IC2.80 IC2.81 IC2.82 IC2.83 IC2.84 IC2.85 IC2.86 IC2.87 IC2.88 IC2.89 IC2.90 IC2.91 IC2.92 IC2.93 IC2.95 IC2.96 IC2.97 IC2.98 J1.2 J1.3 J1.MH1 J4.1 J4.3 J4.5 J4.7 J4.13 J4.14 J4.15 J4.16 J4.18 J4.20 J4.22 J4.26 J4.27 J4.28 J4.29 J4.31 J4.32 J4.33 J4.35 J4.36 J4.37 J4.38 J4.39 J4.40 S1.2 S1.3

## Polygon pours and split planes (outlines as drawn)
GND on Top Layer "GND_L01_P007" (solid, pour order 7): 4343.55,4898 6892.66,4898 6892.66,3717 4332.98,3717
VDD_MCU on Top Layer "VDD_MCU_L01_P000" (solid, pour order 0): 4883,4341 4883,4440 4892,4449 4963,4449 4970,4456 4970,4530 4975,4535 5019,4535 5024,4530 5024,4355 5011,4342
VUSB on Top Layer "VUSB_L01_P004" (solid, pour order 4): 4863,3898 4863,3982 4882,4001 4882,4065 4875,4072 4691,4072 4687,4076 4687,4325 4609,4325 4609,4030 4630,4009 4816,4009 4846,3979 4846,3898
VDDA on Top Layer "VDDA_L01_P005" (solid, pour order 5): 5981,4312 5981,4344 6334,4344 6338,4340 6338,4315 6335,4312
5V_RPi on Top Layer "5V_RPI_L01_P002" (solid, pour order 2): 4609,4850.83 4813,4850.83 4813,4557.83 4687,4557.83 4687,4381.83 4609,4381.83
GND on Bottom Layer "GND_L02_P006" (solid, pour order 6): 4334.88,4898 6892.66,4898 6892.66,3717 4324.31,3717
VDD_MCU on Bottom Layer "VDD_MCU_L02_P001" (solid, pour order 1): 4882.99,4340.98 4882.99,4439.98 4891.99,4448.98 4962.99,4448.98 4969.99,4455.98 4969.99,4529.98 4974.99,4534.98 5018.99,4534.98 5023.99,4529.98 5023.99,4354.98 5010.99,4341.98

## Keep-outs
Keep-Out Layer:
  the board outline again, w7.87

## Silkscreen, mask and mechanical layers (free items; w line width, h text height)
Top Overlay:
  text "IMDEA Networks" at 5031,4319 h39.37
  text "RPi_HAT_STM32H7" at 5028,4280.99 h39.37